# EAGLE board AX02A_29pin_EAGLE (EAGLE 9.3.0)
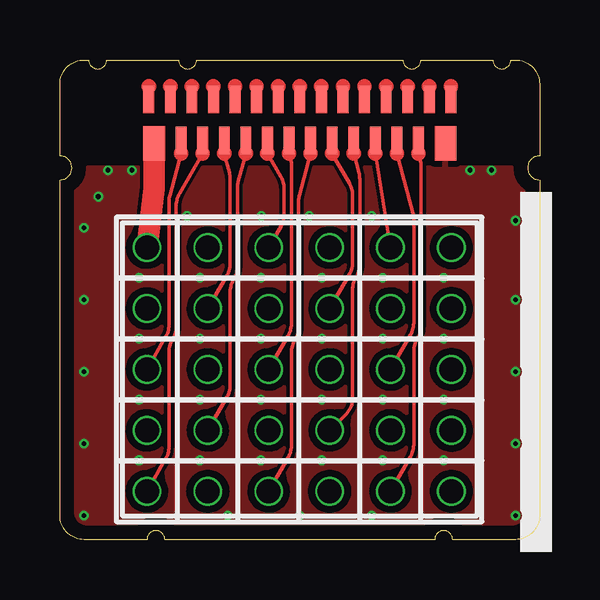
[diagram p0: board, top side]
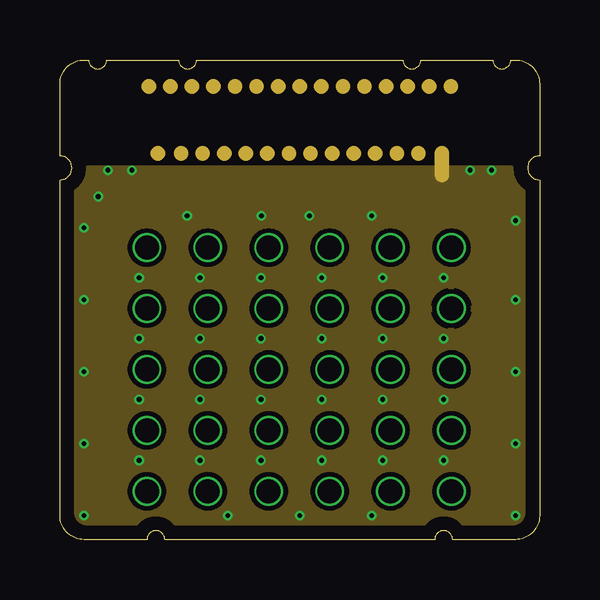
[diagram p1: board, inner layer Route2]
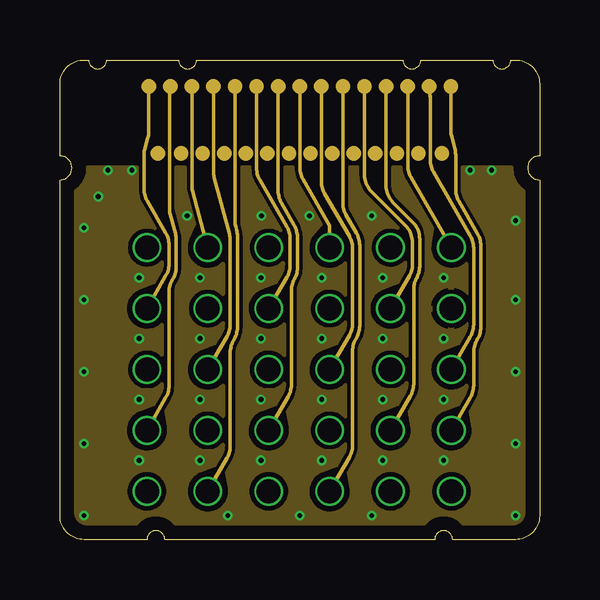
[diagram p2: board, inner layer Route3]
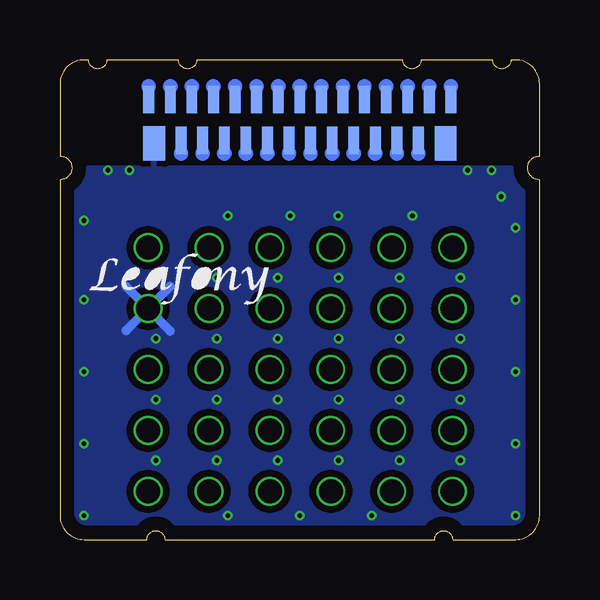
[diagram p3: board, bottom side, seen from below]

Size 20 x 20 mm. Coordinates in mm from the lower left corner, seen from the top.
Outline: 1,0 arc-90 0,1 0,15 arc180 0,16 0,19 arc-90 1,20 1.2,20 arc180 1.95,20 4.95,20 arc180 5.7,20 14.3,20 arc180 15.05,20 18.05,20 arc180 18.8,20 19,20 arc-90 20,19 20,16 arc180 20,15 20,1 arc-90 19,0 16.38,0 arc180 15.62,0 4.38,0 arc180 3.62,0 1,0
Copper layers (1*2+3*16): Top 0.035mm / dielectric 0.15mm / Route2 0.035mm / dielectric 0.15mm / Route3 0.035mm / dielectric 0.2mm / Bottom 0.035mm
Design rules "default": minimum track width 6mil, minimum drill 0.35mm, track to track 0.01mm, track to pad 0.01mm, pad to pad 0.01mm, via to via 6mil, smd to smd 6mil, copper to edge 0.25mm, drill to drill 6mil, minimum pad ring 0.1mm, minimum via ring 0.1mm, stop-mask expansion 4mil, vias tented up to drill 0mil, thermal gap 10mil
Net classes: 0 default: width 0.2 mm, drill 0.6 mm; 1 power: width 0.4 mm, drill 0.8 mm

## Footprints (pad centres in the part's own frame; a part is rotated, then mirrored left to right if it is on the bottom)
PW10180TD = smd 0.9 x 1.45 bottom: B1 -6.075,-0.975; B27 6.075,-0.975 | smd 0.45 x 1.15 bottom: B2 -6.3,0.85; B3 -4.95,-0.85; B4 -5.4,0.85; B5 -4.05,-0.85; B6 -4.5,0.85; B7 -3.15,-0.85; B8 -3.6,0.85; B9 -2.25,-0.85; B10 -2.7,0.85; B11 -1.35,-0.85; B12 -1.8,0.85; B13 -0.45,-0.85; B14 -0.9,0.85; B15 0.45,-0.85; B16 0,0.85; B17 1.35,-0.85; B18 0.9,0.85; B19 2.25,-0.85; B20 1.8,0.85; B21 3.15,-0.85; B22 2.7,0.85; B23 4.05,-0.85; B24 3.6,0.85; B25 4.95,-0.85; B26 4.5,0.85; B28 5.4,0.85; B29 6.3,0.85 | smd 0.9 x 1.45: F1 -6.075,-0.975; F27 6.075,-0.975 | smd 0.45 x 1.15: F2 -6.3,0.85; F3 -4.95,-0.85; F4 -5.4,0.85; F5 -4.05,-0.85; F6 -4.5,0.85; F7 -3.15,-0.85; F8 -3.6,0.85; F9 -2.25,-0.85; F10 -2.7,0.85; F11 -1.35,-0.85; F12 -1.8,0.85; F13 -0.45,-0.85; F14 -0.9,0.85; F15 0.45,-0.85; F16 0,0.85; F17 1.35,-0.85; F18 0.9,0.85; F19 2.25,-0.85; F20 1.8,0.85; F21 3.15,-0.85; F22 2.7,0.85; F23 4.05,-0.85; F24 3.6,0.85; F25 4.95,-0.85; F26 4.5,0.85; F28 5.4,0.85; F29 6.3,0.85
DP002T = drill 1: 1 0,0

## Placement (x,y rotation side)
CN561  [PW10180TD]  10,17.5 0 top
DP561  [DP002T]  3.63,12.17 0 top
DP562  [DP002T]  3.63,9.63 0 top
DP563  [DP002T]  3.63,7.09 0 top
DP564  [DP002T]  3.63,4.55 0 top
DP565  [DP002T]  3.63,2.01 0 top
DP566  [DP002T]  6.17,12.17 0 top
DP567  [DP002T]  6.17,9.63 0 top
DP568  [DP002T]  6.17,7.09 0 top
DP569  [DP002T]  6.17,4.55 0 top
DP570  [DP002T]  6.17,2.01 0 top
DP571  [DP002T]  8.71,12.17 0 top
DP572  [DP002T]  8.71,9.63 0 top
DP573  [DP002T]  8.71,7.09 0 top
DP574  [DP002T]  8.71,4.55 0 top
DP575  [DP002T]  8.71,2.01 0 top
DP576  [DP002T]  11.25,12.17 0 top
DP577  [DP002T]  11.25,9.63 0 top
DP578  [DP002T]  11.25,7.09 0 top
DP579  [DP002T]  11.25,4.55 0 top
DP580  [DP002T]  11.25,2.01 0 top
DP581  [DP002T]  13.79,12.17 0 top
DP582  [DP002T]  13.79,9.63 0 top
DP583  [DP002T]  13.79,7.09 0 top
DP584  [DP002T]  13.79,4.55 0 top
DP585  [DP002T]  13.79,2.01 0 top
DP586  [DP002T]  16.33,12.17 0 top
DP587  [DP002T]  16.33,9.63 0 top
DP588  [DP002T]  16.33,7.09 0 top
DP589  [DP002T]  16.33,4.55 0 top
DP590  [DP002T]  16.33,2.01 0 top

## Library data of the parts
CN561 DP561-DP590 = CR-5000

## Nets
A0 [power]: CN561.B6 CN561.F6 DP566.1
A1 [power]: CN561.B8 CN561.F8 DP568.1
A2 [power]: CN561.B10 CN561.F10 DP570.1
A3 [power]: CN561.B12 CN561.F12 DP572.1
A4 [power]: CN561.B14 CN561.F14 DP574.1
A5 [power]: CN561.B16 CN561.F16 DP576.1
AREF [power]: CN561.B4 CN561.F4 DP564.1
D0 [power]: CN561.B18 CN561.F18 DP578.1
D1 [power]: CN561.B20 CN561.F20 DP580.1
D2 [power]: CN561.B22 CN561.F22 DP582.1
D3 [power]: CN561.B24 CN561.F24 DP584.1
D4 [power]: CN561.B26 CN561.F26 DP586.1
D5 [power]: CN561.B28 CN561.F28 DP588.1
D6 [power]: CN561.B7 CN561.F7 DP567.1
D7 [power]: CN561.B9 CN561.F9 DP569.1
D8 [power]: CN561.B11 CN561.F11 DP571.1
D9 [power]: CN561.B13 CN561.F13 DP573.1
D10 [power]: CN561.B15 CN561.F15 DP575.1
D11 [power]: CN561.B17 CN561.F17 DP577.1
D12 [power]: CN561.B19 CN561.F19 DP579.1
D13 [power]: CN561.B21 CN561.F21 DP581.1
GND [power]: CN561.B27 CN561.F27 DP587.1
P3R3V [power]: CN561.B1 CN561.F1 DP561.1
RESET [power]: CN561.B5 CN561.F5 DP565.1
SCL [power]: CN561.B25 CN561.F25 DP585.1
SDA [power]: CN561.B23 CN561.F23 DP583.1
SWCLK [power]: CN561.B29 CN561.F29 DP589.1
SWDIO [power]: CN561.B2 CN561.F2 DP562.1
VBUS [power]: CN561.B3 CN561.F3 DP563.1

## Tracks (layer width: path | path; a pad name or v marks a point on that pad's centre or on a via)
A0
  Route3 0.15: DP566.1 5.53,14.53 arc-15 5.5,14.79 5.5,18.9
A1
  Route3 0.15: 6.4,18.9 6.4,15.36 arc15 6.43,15.1 7.07,12.74 arc-15 7.1,12.48 7.1,8.98 arc-30 6.97,8.48 DP568.1
A2
  Route3 0.15: 7.3,18.9 7.3,13.28 arc15 7.33,13.02 7.37,12.9 arc-15 7.4,12.64 7.4,8.85 arc-30 7.27,8.35 7.23,8.29 arc30 7.1,7.79 7.1,3.9 arc-30 6.97,3.4 DP570.1
A3
  Route3 0.15: DP572.1 9.47,10.95 arc30 9.6,11.45 9.6,12.53 arc30 9.47,13.03 8.33,14.99 arc-30 8.2,15.49 8.2,18.9
A4
  Route3 0.15: 9.1,18.9 9.1,14.54 arc30 9.23,14.04 9.77,13.12 arc-30 9.9,12.62 9.9,11.32 arc-30 9.78,10.86 | 9.78,10.86 | 9.78,10.86 arc30 9.65,10.39 9.65,6.46 arc-30 9.52,5.96 DP574.1
A5
  Route3 0.15: DP576.1 11.25,13.1 10.13,15.03 arc-30 10,15.53 10,18.9
AREF
  Route3 0.15: DP564.1 4.42,5.92 arc30 4.55,6.42 4.55,10.32 arc-30 4.68,10.82 4.72,10.88 arc30 4.85,11.38 4.85,12.49 arc15 4.82,12.75 4.6,13.57 arc-15 4.56,13.83 4.56,18.49 arc-5 4.56,18.51 4.6,18.9
D0
  Route3 0.15: DP578.1 12.07,8.51 arc30 12.2,9.01 12.2,12.15 arc30 12.07,12.65 11.03,14.44 arc-30 10.9,14.94 10.9,18.9
D1
  Route3 0.15: DP580.1 12.07,3.43 arc30 12.2,3.93 12.2,7.86 arc-30 12.33,8.36 12.37,8.41 arc30 12.5,8.91 12.5,12.28 arc30 12.37,12.78 11.93,13.52 arc-30 11.8,14.02 11.8,18.9
D2
  Route3 0.15: DP582.1 14.57,10.98 arc30 14.7,11.48 14.7,12.39 arc45 14.41,13.09 12.99,14.51 arc-45 12.7,15.21 12.7,18.9
D3
  Route3 0.15: DP584.1 14.62,5.99 arc30 14.75,6.49 14.75,10.45 arc-30 14.88,10.92 | 14.88,10.92 | 14.88,10.92 arc30 15,11.38 15,12.54 arc45 14.71,13.24 13.89,14.06 arc-45 13.6,14.76 13.6,18.9
D4
  Route3 0.15: 14.5,18.9 14.5,15.6 arc30 14.63,15.1 DP586.1
D5
  Route3 0.15: DP588.1 17.12,8.46 arc30 17.25,8.96 17.25,12.17 arc30 17.12,12.67 15.57,15.34 arc-30 15.44,15.84 15.44,18.49 arc5 15.44,18.51 15.4,18.9
D6
  Top 0.15: 6.85,16.1 7.07,15.29 arc-15 7.1,15.04 7.1,11.52 arc-30 6.97,11.02 DP567.1
D7
  Top 0.15: 7.75,16.1 7.43,14.92 arc15 7.4,14.66 7.4,11.39 arc-30 7.27,10.89 7.23,10.84 arc30 7.1,10.34 7.1,6.44 arc-30 6.97,5.94 DP569.1
D8
  Top 0.15: DP571.1 9.22,13.05 arc30 9.35,13.55 9.35,14.62 arc30 9.22,15.12 8.65,16.1
D9
  Top 0.15: DP573.1 9.52,8.49 arc30 9.65,8.99 9.65,15.73 9.55,16.1
D10
  Top 0.15: 10.45,16.1 9.98,14.36 arc15 9.95,14.1 9.95,8.84 arc-30 9.82,8.34 9.78,8.29 arc30 9.65,7.79 9.65,3.92 arc-30 9.52,3.42 DP575.1
D11
  Top 0.15: 11.35,16.1 12.07,14.86 arc-30 12.2,14.36 12.2,11.55 arc-30 12.07,11.05 DP577.1
D12
  Top 0.15: 12.25,16.1 12.47,15.29 arc-15 12.5,15.04 12.5,11.46 arc-30 12.37,10.96 12.33,10.91 arc30 12.2,10.41 12.2,5.88 arc-45 11.94,5.24 DP579.1
D13
  Top 0.15: 13.15,16.1 DP581.1
GND  (via drill 0.2 pad 0.4)
  Route2 0.6: 15.93,16.1 15.93,15.2
  Bottom 0.4: DP587.1 15.4,8.71 | DP587.1 17.25,8.71 | DP587.1 15.41,10.55 | DP587.1 17.24,10.55
  other vias: 10.4,13.5 13,13.5 8.4,13.5 5.3,13.5 3.3,10.92 5.84,10.92 8.38,10.92 10.92,10.92 13.46,10.92 16,10.92 3.3,8.38 5.84,8.38 8.38,8.38 10.92,8.38 13.46,8.38 16,8.38 3.3,5.84 5.84,5.84 8.38,5.84 10.92,5.84 13.46,5.84 16,5.84 3.3,3.3 5.84,3.3 8.38,3.3 10.92,3.3 13.46,3.3 16,3.3 18,15.4 17.1,15.4 3,15.4 2,15.4 19,13.3 1.6,14.3 1,13 1,10 1,7 13,1 10,1 7,1 1,4 1,1 19,10 19,7 19,4 19,1
  pour Top: 15.35,15.3 arc-90 15.28,15.38 15.28,15.53 arc-90 15.35,15.6 15.43,15.6 arc90 15.62,15.8 15.62,16.12 arc-90 15.7,16.2 16.45,16.2 arc-90 16.52,16.12 16.52,15.8 arc90 16.73,15.6 16.95,15.6 arc-90 17.02,15.53 17.02,15.38 arc-90 16.95,15.3
  pour Top: 217 corners
  cutout Top: 16.33,11.27 arc-180 16.33,13.07 arc-180
  cutout Top: 16.33,8.73 arc-180 16.33,10.53 arc-180
  cutout Top: 16.33,6.19 arc-180 16.33,7.99 arc-180
  cutout Top: 16.33,3.65 arc-180 16.33,5.45 arc-180
  cutout Top: 16.33,1.11 arc-180 16.33,2.91 arc-180
  cutout Top: 11.25,1.11 arc-180 11.25,2.91 arc-180
  cutout Top: 6.17,1.11 arc-180 6.17,2.91 arc-180
  pour Top: 0.68,14.1 arc-90 0.6,14.18 0.6,14.54 arc-45 0.62,14.59 arc-10 0.63,14.6 arc55 1.1,15.5 1.1,15.53 arc-90 1.18,15.6 3.25,15.6 arc-90 3.33,15.53 3.33,14.76 arc-7 3.32,14.71 arc0 3.32,14.71 3.26,14.17 arc0 3.26,14.17 arc-1 3.26,14.17 3.26,14.17 arc-83 3.18,14.1
  pour Top: 5.22,14.1 arc-103 5.15,14.19 arc-17 5.23,14.4 5.89,15.55 arc-32 5.92,15.58 5.95,15.59 arc-28 5.98,15.6 6.69,15.6 arc-75 6.77,15.54 6.85,15.24 arc-15 6.88,15.04 6.88,14.18 arc-90 6.8,14.1
  pour Top: 7.7,14.1 arc-90 7.62,14.18 7.62,14.66 arc-15 7.65,14.86 7.83,15.54 arc-75 7.91,15.6 8.62,15.6 arc-28 8.65,15.59 8.68,15.58 arc-32 8.71,15.55 9.02,15.01 arc-30 9.12,14.62 9.12,14.18 arc-90 9.05,14.1
  pour Top: 10.25,14.1 arc-96 10.18,14.18 arc-9 10.2,14.3 10.53,15.54 arc-75 10.61,15.6 11.32,15.6 arc-28 11.35,15.59 11.38,15.58 arc-32 11.41,15.55 11.87,14.75 arc-30 11.97,14.36 11.97,14.18 arc-90 11.9,14.1
  pour Top: 12.8,14.1 arc-90 12.72,14.18 12.72,15.04 arc15 12.68,15.35 arc0 12.68,15.35 12.64,15.51 arc-105 12.71,15.6 12.94,15.6 arc-81 13.01,15.54 13.23,14.19 arc-99 13.16,14.1
  pour Top: 15.35,14.1 arc-90 15.28,14.18 15.28,15.53 arc-90 15.35,15.6 18.82,15.6 arc-90 18.9,15.53 18.9,15.5 arc55 19.37,14.6 arc-55 19.4,14.54 19.4,14.18 arc-90 19.32,14.1
  pour Route2: 1.1,0.6 arc-90 0.6,1.1 0.6,14.54 arc-45 0.62,14.59 arc-10 0.63,14.6 arc55 1.1,15.5 1.1,15.53 arc-90 1.18,15.6 18.82,15.6 arc-90 18.9,15.53 18.9,15.5 arc55 19.37,14.6 arc-55 19.4,14.54 19.4,1.1 arc-90 18.9,0.6 16.8,0.6 arc-45 16.75,0.62 arc-5 16.75,0.63 arc0 16.75,0.63 arc100 15.25,0.63 arc-50 15.2,0.6 4.8,0.6 arc-45 4.75,0.62 arc-5 4.75,0.63 arc0 4.75,0.63 arc100 3.25,0.63 arc-50 3.2,0.6
  cutout Route2: 3.63,8.83 arc-180 3.63,10.43 arc-180
  cutout Route2: 3.63,11.37 arc-180 3.63,12.97 arc-180
  cutout Route2: 6.17,11.37 arc-180 6.17,12.97 arc-180
  cutout Route2: 6.17,8.83 arc-180 6.17,10.43 arc-180
  cutout Route2: 8.71,8.83 arc-180 8.71,10.43 arc-180
  cutout Route2: 8.71,11.37 arc-180 8.71,12.97 arc-180
  cutout Route2: 11.25,11.37 arc-180 11.25,12.97 arc-180
  cutout Route2: 11.25,8.83 arc-180 11.25,10.43 arc-180
  cutout Route2: 13.79,8.83 arc-180 13.79,10.43 arc-180
  cutout Route2: 13.79,11.37 arc-180 13.79,12.97 arc-180
  cutout Route2: 16.33,11.37 arc-180 16.33,12.97 arc-180
  cutout Route2: 16.33,8.83 arc-180 16.33,10.43 arc-180
  cutout Route2: 3.63,6.29 arc-180 3.63,7.89 arc-180
  cutout Route2: 6.17,6.29 arc-180 6.17,7.89 arc-180
  cutout Route2: 8.71,6.29 arc-180 8.71,7.89 arc-180
  cutout Route2: 11.25,6.29 arc-180 11.25,7.89 arc-180
  cutout Route2: 13.79,6.29 arc-180 13.79,7.89 arc-180
  cutout Route2: 16.33,6.29 arc-180 16.33,7.89 arc-180
  cutout Route2: 16.33,3.75 arc-180 16.33,5.35 arc-180
  cutout Route2: 13.79,3.75 arc-180 13.79,5.35 arc-180
  cutout Route2: 11.25,3.75 arc-180 11.25,5.35 arc-180
  cutout Route2: 8.71,3.75 arc-180 8.71,5.35 arc-180
  cutout Route2: 6.17,3.75 arc-180 6.17,5.35 arc-180
  cutout Route2: 3.63,3.75 arc-180 3.63,5.35 arc-180
  cutout Route2: 3.63,1.21 arc-180 3.63,2.81 arc-180
  cutout Route2: 6.17,1.21 arc-180 6.17,2.81 arc-180
  cutout Route2: 8.71,1.21 arc-180 8.71,2.81 arc-180
  cutout Route2: 11.25,1.21 arc-180 11.25,2.81 arc-180
  cutout Route2: 13.79,1.21 arc-180 13.79,2.81 arc-180
  cutout Route2: 16.33,1.21 arc-180 16.33,2.81 arc-180
  pour Route3: 313 corners
  cutout Route3: 16.33,1.21 arc-180 16.33,2.81 arc-180
  cutout Route3: 13.79,1.21 arc-180 13.79,2.81 arc-180
  cutout Route3: 8.71,1.21 arc-180 8.71,2.81 arc-180
  cutout Route3: 3.63,1.21 arc-180 3.63,2.81 arc-180
  pour Bottom: 1.1,0.6 arc-90 0.6,1.1 0.6,14.43 arc-90 0.68,14.5 19.32,14.5 arc-90 19.4,14.43 19.4,1.1 arc-90 18.9,0.6 16.8,0.6 arc-45 16.75,0.62 arc-5 16.75,0.63 arc0 16.75,0.63 arc100 15.25,0.63 arc-23 15.23,0.61 15.23,0.61 arc-27 15.2,0.6 4.8,0.6 arc-45 4.75,0.62 arc-5 4.75,0.63 arc0 4.75,0.63 arc100 3.25,0.63 arc-23 3.23,0.61 3.23,0.61 arc-27 3.2,0.6
  cutout Bottom: 16.33,11.27 arc-180 16.33,13.07 arc-180
  cutout Bottom: 13.79,11.27 arc-180 13.79,13.07 arc-180
  cutout Bottom: 11.25,11.27 arc-180 11.25,13.07 arc-180
  cutout Bottom: 8.71,11.27 arc-180 8.71,13.07 arc-180
  cutout Bottom: 6.17,11.27 arc-180 6.17,13.07 arc-180
  cutout Bottom: 3.63,11.27 arc-180 3.63,13.07 arc-180
  cutout Bottom: 3.63,8.73 arc-180 3.63,10.53 arc-180
  cutout Bottom: 6.17,8.73 arc-180 6.17,10.53 arc-180
  cutout Bottom: 8.71,8.73 arc-180 8.71,10.53 arc-180
  cutout Bottom: 11.25,8.73 arc-180 11.25,10.53 arc-180
  cutout Bottom: 13.79,8.73 arc-180 13.79,10.53 arc-180
  cutout Bottom: 16.33,8.73 arc-180 16.33,10.53 arc-180
  cutout Bottom: 16.33,6.19 arc-180 16.33,7.99 arc-180
  cutout Bottom: 13.79,6.19 arc-180 13.79,7.99 arc-180
  cutout Bottom: 11.25,6.19 arc-180 11.25,7.99 arc-180
  cutout Bottom: 8.71,6.19 arc-180 8.71,7.99 arc-180
  cutout Bottom: 6.17,6.19 arc-180 6.17,7.99 arc-180
  cutout Bottom: 3.63,6.19 arc-180 3.63,7.99 arc-180
  cutout Bottom: 3.63,3.65 arc-180 3.63,5.45 arc-180
  cutout Bottom: 6.17,3.65 arc-180 6.17,5.45 arc-180
  cutout Bottom: 8.71,3.65 arc-180 8.71,5.45 arc-180
  cutout Bottom: 11.25,3.65 arc-180 11.25,5.45 arc-180
  cutout Bottom: 13.79,3.65 arc-180 13.79,5.45 arc-180
  cutout Bottom: 16.33,3.65 arc-180 16.33,5.45 arc-180
  cutout Bottom: 16.33,1.11 arc-180 16.33,2.91 arc-180
  cutout Bottom: 13.79,1.11 arc-180 13.79,2.91 arc-180
  cutout Bottom: 11.25,1.11 arc-180 11.25,2.91 arc-180
  cutout Bottom: 8.71,1.11 arc-180 8.71,2.91 arc-180
  cutout Bottom: 6.17,1.11 arc-180 6.17,2.91 arc-180
  cutout Bottom: 3.63,1.11 arc-180 3.63,2.91 arc-180
  pour Bottom: 0.68,14.1 arc-90 0.6,14.18 0.6,14.54 arc-45 0.62,14.59 arc-10 0.63,14.6 arc55 1.1,15.5 1.1,15.53 arc-90 1.18,15.6 18.82,15.6 arc-90 18.9,15.53 18.9,15.5 arc55 19.37,14.6 arc-28 19.39,14.57 arc-27 19.4,14.54 19.4,14.18 arc-90 19.32,14.1
  pour Bottom: 15.25,15.3 arc-90 15.18,15.38 15.18,15.53 arc-90 15.25,15.6 15.43,15.6 arc90 15.62,15.8 15.62,16.12 arc-90 15.7,16.2 16.45,16.2 arc-90 16.52,16.12 16.52,15.8 arc90 16.73,15.6 16.95,15.6 arc-90 17.02,15.53 17.02,15.38 arc-90 16.95,15.3
P3R3V
  Top 0.9: DP561.1 3.92,14.64 arc7 3.92,14.76 CN561.F1
RESET
  Top 0.15: 5.95,16.1 4.98,14.43 arc30 4.85,13.93 4.85,8.88 arc-30 4.72,8.38 4.68,8.32 arc30 4.55,7.82 4.55,3.88 arc-30 4.42,3.38 DP565.1
SCL
  Top 0.15: DP585.1 14.62,3.45 arc30 14.75,3.95 14.75,7.85 arc-30 14.88,8.35 14.92,8.4 arc30 15.05,8.9 15.05,15.73 14.95,16.1
SDA
  Top 0.15: DP583.1 14.62,8.53 arc30 14.75,9.03 14.75,13.36 arc15 14.72,13.62 14.05,16.1
SWCLK
  Route3 0.15: DP589.1 17.12,5.92 arc30 17.25,6.42 17.25,7.81 arc-30 17.38,8.31 17.42,8.36 arc30 17.55,8.86 17.55,12.25 arc30 17.42,12.75 16.63,14.11 arc-30 16.5,14.61 16.5,16.05 arc15 16.47,16.3 16.33,16.8 arc-15 16.3,17.05 16.3,18.9
SWDIO
  Route3 0.15: 3.7,18.9 3.7,17 arc-15 3.67,16.75 3.53,16.25 arc15 3.5,15.99 3.5,14.63 arc30 3.63,14.13 4.42,12.78 arc-30 4.55,12.28 4.55,11.5 arc-30 4.42,11 DP562.1
VBUS
  Top 0.15: DP563.1 4.42,8.46 arc30 4.55,8.96 4.55,14.1 arc-15 4.58,14.36 5.05,16.1